# EAGLE board Brooder_sch_v1.1 (EAGLE 9.0.1)

Size 100 x 100 mm. Coordinates in mm from the lower left corner, seen from the top.
Outline: 0,0 100,0 100,100 0,100 0,0
Copper layers (1*16): Top 0.035mm / dielectric 1.5mm / Bottom 0.035mm
Design rules "default": minimum track width 6mil, minimum drill 0.35mm, track to track 6mil, track to pad 6mil, pad to pad 6mil, via to via 6mil, smd to smd 6mil, copper to edge 40mil, drill to drill 6mil, minimum pad ring 10mil, minimum via ring 8mil, stop-mask expansion 4mil, vias tented up to drill 0mil, thermal gap 10mil

## Footprints (pad centres in the part's own frame; a part is rotated, then mirrored left to right if it is on the bottom)
1X2-3.5MM = drill 1 pad 2.184: 1 1.8,0; 2 -1.7,0
CPOL-RADIAL-2.5MM-5MM = drill 0.7 pad 1.651 square: 1 1.25,0 | drill 0.7 pad 1.651: 2 -1.25,0
CAP-PTH-2.54 = drill 0.7 pad 1.651: 1 -1.27,0; 2 1.27,0
DO41-10 = drill 1.118 pad 1.93: A 5.08,0; C -5.08,0
1X03 = drill 1.016 pad 1.88: 1 0,0; 2 2.54,0; 3 5.08,0
1X06_NO_SILK = drill 1.016 pad 1.88: 1 0,0; 2 2.54,0; 3 5.08,0; 4 7.62,0; 5 10.16,0; 6 12.7,0
78XXS = drill 1.016 long: GND 0,-2.54; IN -2.54,-2.54; OUT 2.54,-2.54
2X03 = drill 1.016 octagon: 1 -2.54,-1.27; 2 -2.54,1.27; 3 0,-1.27; 4 0,1.27; 5 2.54,-1.27; 6 2.54,1.27
1X04 = drill 1.016 long: 1 -3.81,0; 2 -1.27,0; 3 1.27,0; 4 3.81,0
LED5MM = drill 0.813 pad 1.676 octagon: A -1.27,0; K 1.27,0
SCREWTERMINAL-5MM-2 = drill 1.3 pad 2.032 square: 1 0,0 | drill 1.3 pad 2.032: 2 5,0
HC49/S = drill 0.813: 1 -2.413,0; 2 2.413,0
AXIAL-0.3 = drill 0.9 pad 1.88: P$1 -3.81,0; P$2 3.81,0
TACTILE_SWITCH_PTH_6.0MM = drill 1.016 pad 1.88: 1 -3.251,2.261; 2 3.251,2.261; 3 -3.251,-2.261; 4 3.251,-2.261
TO92-EBC-OVAL = drill 0.813 long: B 0,-1.27; C 2.54,-1.27; E -2.54,-1.27
DIP28 = drill 0.813 pad 1.626: 1 -16.51,-3.81; 2 -13.97,-3.81; 3 -11.43,-3.81; 4 -8.89,-3.81; 5 -6.35,-3.81; 6 -3.81,-3.81; 7 -1.27,-3.81; 8 1.27,-3.81; 9 3.81,-3.81; 10 6.35,-3.81; 11 8.89,-3.81; 12 11.43,-3.81; 13 13.97,-3.81; 14 16.51,-3.81; 15 16.51,3.81; 16 13.97,3.81; 17 11.43,3.81; 18 8.89,3.81; 19 6.35,3.81; 20 3.81,3.81; 21 1.27,3.81; 22 -1.27,3.81; 23 -3.81,3.81; 24 -6.35,3.81; 25 -8.89,3.81; 26 -11.43,3.81; 27 -13.97,3.81; 28 -16.51,3.81
SRD-05VDC-SL-C = drill 0.9: COIL0 -5.39,-6.12; COIL1 -5.39,5.88; SWCLOSED 6.61,-6.12; SWCOMMON -7.39,-0.12; SWOPEN 6.61,5.88
LM2596_BREAKOUTBOARD = drill 0.6: IN(+VE) 41.505,1.467; IN(-VE) 41.457,19.488; OUT(+VE) 1.5,1.7; OUT(-VE) 1.504,19.475
RTC-DS3231-AT24C32 = drill 1 square: J1.1 -17.78,6.35; J2.1 17.78,3.81 | drill 1: J1.2 -17.78,3.81; J1.3 -17.78,1.27; J1.4 -17.78,-1.27; J1.5 -17.78,-3.81; J1.6 -17.78,-6.35; J2.2 17.78,1.27; J2.3 17.78,-1.27; J2.4 17.78,-3.81 | hole 2.2: -11.43,-9.525; -11.43,9.525; 15.24,9.525
20*4_LCD = drill 0.6 pad 1.27: 1 38.5,19; 2 38.5,16.5; 3 38.5,14; 4 38.5,11.5; 5 38.5,9; 6 38.5,6.5; 7 38.5,4
SD_CARD_MODULE = drill 0.6 pad 1.27 square: 1 38.1,17.78 | drill 0.6 pad 1.27: 2 38.1,15.24; 3 38.1,12.7; 4 38.1,10.16; 5 38.1,7.62; 6 38.1,5.08

## Placement (x,y rotation side)
12V_GSM  1X2-3.5MM  [1X2-3.5MM]  93.75,79.74 270 top
12V_SYS  1X2-3.5MM  [1X2-3.5MM]  3.91,3.43 180 top
C1  10uF  [CPOL-RADIAL-2.5MM-5MM]  18.92,4.75 90 top
C2  10uF  [CPOL-RADIAL-2.5MM-5MM]  38.78,4.6 90 top
C3  22pF  [CAP-PTH-2.54]  12.46,39.96 270 top
C4  22pF  [CAP-PTH-2.54]  12.36,34.51 90 top
C5  0.1uF  [CAP-PTH-2.54]  23.59,58.27 270 top
D1  1N4007  [DO41-10]  68.45,81.4 90 top
DHT22_1  455-1750-1-ND  [1X03]  1,-127 0 top  (outside the outline)
DHT22_2  455-1750-1-ND  [1X03]  4.19,19.93 270 top
DHT22_3  455-1750-1-ND  [1X03]  1,-165 0 top  (outside the outline)
DS18B20  455-1750-1-ND  [1X03]  1,-203 0 top  (outside the outline)
FTDI  [1X06_NO_SILK]  4.59,72.53 0 top
IC1  [78XXS]  28.74,8.44 0 top
J2  1X2-3.5MM  [1X2-3.5MM]  93.72,72.86 270 top
J4  1X2-3.5MM  [1X2-3.5MM]  10.92,3.37 180 top
JP1  [2X03]  70.01,27.37 270 top
JP2  [1X04]  47.97,38.6 0 top
LED1  [LED5MM]  39.19,11.6 270 top
LED2  [LED5MM]  80.02,85.18 90 top
LOAD  [SCREWTERMINAL-5MM-2]  36.65,84.51 0 top
PWR  [SCREWTERMINAL-5MM-2]  25.5,84.52 0 top
Q1  [HC49/S]  17.41,36.8 90 top
R2  10k  [AXIAL-0.3]  23.64,66.72 90 top
R3  220  [AXIAL-0.3]  28.97,12.76 180 top
R4  220  [AXIAL-0.3]  74.01,80.3 270 top
R5  680  [AXIAL-0.3]  4.4,-51.37 0 top  (outside the outline)
R6  1k  [AXIAL-0.3]  84.14,78.36 180 top
R9  680  [AXIAL-0.3]  5,-108 0 top  (outside the outline)
R10  680  [AXIAL-0.3]  5,-146 0 top  (outside the outline)
R11  680  [AXIAL-0.3]  5,-184 0 top  (outside the outline)
S1  SWITCH  [TACTILE_SWITCH_PTH_6.0MM]  31.13,59.19 0 top
T1  2N2222  [TO92-EBC-OVAL]  87.91,85.08 180 top
U1  328P  [DIP28]  31.47,35.49 270 top
U$1  RELAYPTH  [SRD-05VDC-SL-C]  54.96,84.65 90 top
U$2  [LM2596_BREAKOUTBOARD]  98.9,24.28 90 top
U$3  RTC-DS3231-AT24C32  [RTC-DS3231-AT24C32]  57.84,57.42 0 top
U$4  [20*4_LCD]  99.42,-21.18 90 top
U$5  SD_CARD_MODULE  [SD_CARD_MODULE]  68.29,-21.3 90 top

## Library data of the parts
12V_GSM 12V_SYS D1 J2 J4 LED1 LED2 T1 = adafruit
C1 C2 = SparkFun-Capacitors; PROD_ID: CAP-08440
C3-C5 = SparkFun-Capacitors; PROD_ID: CAP-09128
DHT22_1-DHT22_3 DS18B20 = SparkFun-Connectors; PROD_ID: XXX-00000
FTDI = SparkFun-Connectors; PROD_ID: CONN-08437
IC1 = v-reg
JP1 JP2 = pinhead
LOAD PWR = SparkFun-Connectors; SF_SKU: PRT-08432
Q1 = adafruit; OC_FARNELL: 1667008; OC_NEWARK: unknown
R2-R6 R9-R11 = SparkFun-Resistors; PROD_ID: RES-09327
S1 = SparkFun-Switches; PROD_ID: SWCH-08441; SF_SKU: COM-00097
U1 = SparkFun-IC-Microcontroller; PROD_ID: IC-09136
U$1 = SRD-05VDC-SL-C
U$2 = LM2596_BREAKOUT_BOARD
U$3 = diy-modules-1.8.0
U$4 U$5 = custom_libraries

## Nets
5V: C2.1 D1.C DHT22_1.1 DHT22_2.1 DHT22_3.1 DS18B20.1 FTDI.1 IC1.OUT JP1.2 JP2.3 R2.P$2 R3.P$2 R4.P$2 R5.P$2 R9.P$2 R10.P$2 R11.P$2 U1.7 U1.20 U1.21 U$1.COIL1 U$3.J2.3 U$4.3 U$5.2
5V_SIM: U$2.OUT(+VE) U$4.1
12V: 12V_SYS.1 J4.1
12V_S: C1.1 IC1.IN J4.2
12V_S_SIM: J2.2 U$2.IN(+VE)
12V_SIM: 12V_GSM.1 J2.1
DTR: C5.1 FTDI.5 R2.P$1
GND: 12V_GSM.2 12V_SYS.2 C1.2 C2.2 C3.2 C4.2 DHT22_1.2 DHT22_2.2 DHT22_3.2 DS18B20.2 FTDI.2 IC1.GND JP1.6 JP2.4 LED1.K S1.1 T1.E U1.8 U1.22 U$2.IN(-VE) U$2.OUT(-VE) U$3.J2.4 U$4.2 U$4.6 U$5.1
GND.1: U$3.J1.6
MISO: JP1.1 U1.18 U$5.3
MOSI: JP1.4 U1.17 U$5.4
N$1: LOAD.2 U$1.SWCOMMON
N$2: LED1.A R3.P$1
N$3: LOAD.1 PWR.2
N$5: C4.1 Q1.1 U1.10
N$6: D1.A LED2.K T1.C U$1.COIL0
N$7: LED2.A R4.P$1
N$8: C3.1 Q1.2 U1.9
N$10: R6.P$1 T1.B
N$13: PWR.1 U$1.SWCLOSED
PB0: DHT22_2.3 R5.P$1 U1.14
PB1: DHT22_1.3 R9.P$1 U1.15
PC0: DS18B20.3 R11.P$1 U1.23
PC1: R6.P$2 U1.24
PD0: FTDI.3 U1.2
PD1: FTDI.4 U1.3
PD2: U1.4
PD3: U1.5
PD4: U1.6
PD5: U1.11
PD6: U1.12
PD7: DHT22_3.3 R10.P$1 U1.13
RESET: C5.2 JP1.5 S1.3 U1.1
RX: U1.26 U$4.5
SCK: JP1.3 U1.19 U$5.5
SCL: JP2.1 U1.28 U$3.J2.1
SDA: JP2.2 U1.27 U$3.J2.2
SS: U1.16 U$5.6
TX: U1.25 U$4.4
VCC.1: U$3.J1.5

## Tracks (layer width: path | path; a pad name or v marks a point on that pad's centre or on a via)
5V  (23 unrouted)
5V_SIM  (1 unrouted)
12V  (1 unrouted)
12V_S  (2 unrouted)
12V_S_SIM  (1 unrouted)
12V_SIM  (1 unrouted)
DTR  (2 unrouted)
GND  (24 unrouted)
MISO  (2 unrouted)
MOSI  (2 unrouted)
N$1  (1 unrouted)
N$2  (1 unrouted)
N$3  (1 unrouted)
N$5  (2 unrouted)
N$6  (3 unrouted)
N$7  (1 unrouted)
N$8  (2 unrouted)
N$10  (1 unrouted)
N$13  (1 unrouted)
PB0  (2 unrouted)
PB1  (2 unrouted)
PC0  (2 unrouted)
PC1  (1 unrouted)
PD0  (1 unrouted)
PD1  (1 unrouted)
PD7  (2 unrouted)
RESET  (3 unrouted)
RX  (1 unrouted)
SCK  (2 unrouted)
SCL  (2 unrouted)
SDA  (2 unrouted)
SS  (1 unrouted)
TX  (1 unrouted)